# Altium PCB mainBoard.PcbDoc
Units mm, origin at the board's own origin, x right, y up, seen from the top; angles counter-clockwise.
Board outline 84 x 68 mm, 2 copper layers (Top Layer, Bottom Layer); 84 components, 78 nets, 314 pads, 0 vias.
Unrouted connection lines stored in the file: 203.
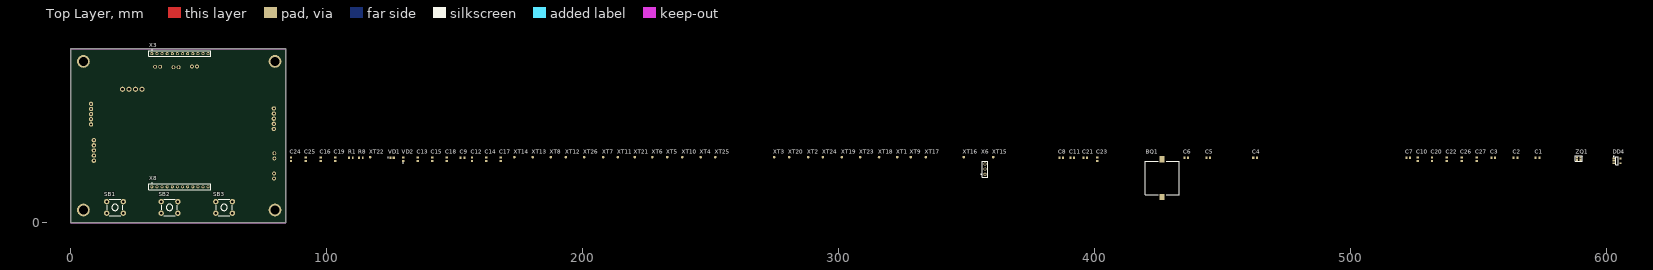
[diagram p0: Top Layer view]
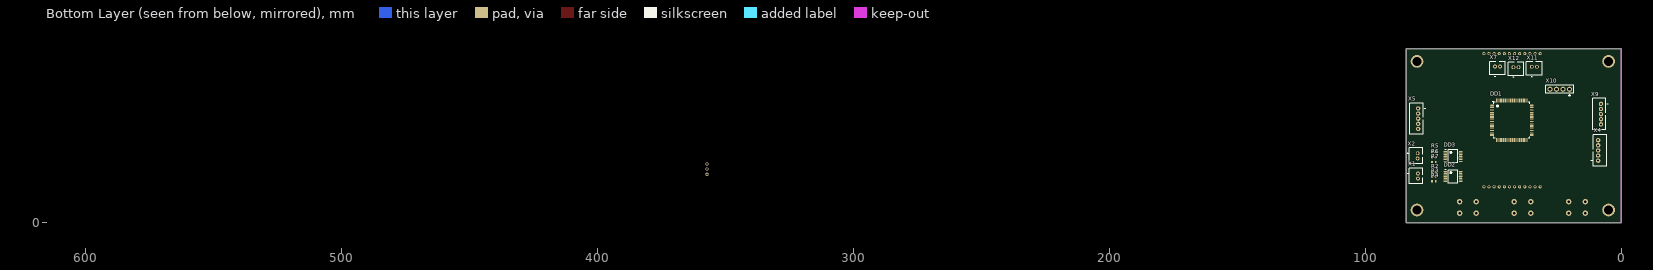
[diagram p1: Bottom Layer view, seen from below]

## Layer stack, top to bottom
Top Solder: solder mask 0.0102, Solder Resist, Dk 3.5
Top Layer: signal copper 0.0356
Dielectric 1: dielectric 0.32, FR-4, Dk 4.8
Bottom Layer: signal copper 0.0356
Bottom Solder: solder mask 0.0102, Solder Resist, Dk 3.5

## Board outline
0,0 84,0 84,68 0,68

## Design rules (kind name [scope] priority, off if disabled: settings)
Clearance [All] p1: gap=0.254 ignorepadtopadclearanceinfootprint=FALSE except(0: Arc-Hole Track-Hole SMDPad-Hole THPad-Hole Via-Hole Fill-Hole Poly-Hole Region-Hole Text-Hole)
PolygonConnect [All] p1: connectstyle=Relief reliefconductorwidth=0.254 reliefentries=4 polygonreliefangle="90 Angle" airgapwidth=0.254
RoutingVias [All] p1: holewidth=0.711 width=1.27 viastyle="Through Hole" minholewidth=0.711 minwidth=1.27 maxholewidth=0.711 maxwidth=1.27
SolderMaskExpansion [All] p1: expansion=0.102
Width [All] p1: maxlimit=0.254 minlimit=0.254 preferedwidth=0.254
30 further rules are at their usual default settings.

## Components (designator, comment, footprint, x,y, rotation, side; value= is the part's Value field where it differs from the comment)
BQ1 "HPS13C" HPS13C 426.399,17.4 r0 top
C1 "0.01u" C0603 572.999,25.4 r0 top
C2 "0.1u" C0603 564.399,25.4 r0 top
C3 "0.01u" C0603 555.699,25.4 r0 top
C4 "0.01u" C0603 462.699,25.4 r0 top
C5 "0.1u" C0603 444.399,25.4 r0 top
C6 "0.01u" C0603 435.799,25.4 r0 top
C7 "10u" C0603 522.499,25.4 r0 top
C8 "10u" C0603 386.999,25.4 r0 top
C9 "4.7u" C0603 153.1,25.4 r0 top
C10 "0.1u" C0603 526.199,24.8 r90 top
C11 "0.1u" C0603 391.299,25.4 r0 top
C12 "0.1u" C0603 156.8,24.8 r90 top
C13 "0.1u" C0603 135.7,24.8 r90 top
C14 "0.1u" C0603 162.4,24.8 r90 top
C15 "0.1u" C0603 141.3,24.8 r90 top
C16 "1u" C0603 97.8,24.8 r90 top
C17 "0.1u" C0603 168,24.8 r90 top
C18 "0.1u" C0603 146.9,24.8 r90 top
C19 "0.1u" C0603 103.4,24.8 r90 top
C20 "10u" C0603 531.799,24.8 r90 top
C21 "10u" C0603 396.399,25.4 r0 top
C22 "0.1u" C0603 537.599,24.8 r90 top
C23 "0.1u" C0603 401.099,24.8 r90 top
C24 "2.2u" C0603 86.1,24.8 r90 top
C25 "2.2u" C0603 91.9,24.8 r90 top
C26 "6p" C0603 543.399,24.8 r90 top
C27 "6p" C0603 549.299,24.8 r90 top
DD1 "STM32F407V" LQFP100 42.8,40 r180 bottom locked
DD2 "MAX31856MUD" TSSOP65P640X120-14N 65.8,18 r180 bottom
DD3 "MAX31856MUD" TSSOP65P640X120-14N 65.8,25.9 r180 bottom
DD4 "24AA08" SOT95P245X145-5N 604.099,24.1 r0 top
R1 "200" R0603 109.5,25.4 r0 top
R2 "0" R0603 73.3,19.7 r180 bottom
R3 "0" R0603 73.3,17.9 r180 bottom
R4 "0" R0603 73.3,16.1 r180 bottom
R5 "0" R0603 73.3,27.7 r180 bottom
R6 "0" R0603 73.3,25.6 r180 bottom
R7 "0" R0603 73.3,23.7 r180 bottom
R8 "200" R0603 113.4,25.4 r0 top
SB1 "*" TS_6x6 17.371,5.943 r0 top
SB2 "*" TS_6x6 38.671,5.943 r0 top
SB3 "*" TS_6x6 59.971,5.943 r0 top
VD1 "*" "LED 0603_Green" 125.6,25.4 r0 top value="0603 green"
VD2 "*" "LED 0603_RED" 129.9,24.8 r90 top value=0603red
X1 "DS1066-02M" DS1066-02M 80.2,18.2 r270 bottom
X2 "DS1066-02M" DS1066-02M 80.3,26.1 r270 bottom
X3 "PBS2-12" PBS2-12 31.738,66 r0 top
X4 "DS1066-05M" DS1066-05M 8.4,28.2 r90 bottom
X5 "DS1066-05M" DS1066-05M 80.1,40.6 r270 bottom
X6 "PLS2-3" PLS2-3 357.199,20.9 r90 top
X7 "DS1066-02M" DS1066-02M 48.4,60.3 r180 bottom
X8 "PBS2-12" PBS2-12 31.738,14 r0 top
X9 "DS1066-06M" DS1066-05M 8.7,42.4 r270 bottom
X10 "PLS-4" PLS-4 24.1,52.1 r0 bottom
X11 "DS1066-02M" DS1066-02M 34,60.2 r180 bottom
X12 "DS1066-02M" DS1066-02M 41.2,60 r180 bottom
XT1 "CheckPoint" CheckPoint_2mm 322.899,25.6 r90 top
XT2 "CheckPoint" CheckPoint_2mm 288.099,25.6 r90 top
XT3 "CheckPoint" CheckPoint_2mm 274.799,25.6 r90 top
XT4 "CheckPoint" CheckPoint_2mm 246.099,25.6 r90 top
XT5 "CheckPoint" CheckPoint_2mm 233.099,25.6 r90 top
XT6 "CheckPoint" CheckPoint_2mm 227.299,25.6 r90 top
XT7 "CheckPoint" CheckPoint_2mm 208,25.6 r90 top
XT8 "CheckPoint" CheckPoint_2mm 187.6,25.6 r90 top
XT9 "CheckPoint" CheckPoint_2mm 328.199,25.6 r90 top
XT10 "CheckPoint" CheckPoint_2mm 238.999,25.6 r90 top
XT11 "CheckPoint" CheckPoint_2mm 213.8,25.6 r90 top
XT12 "CheckPoint" CheckPoint_2mm 193.5,25.6 r90 top
XT13 "CheckPoint" CheckPoint_2mm 180.5,25.6 r90 top
XT14 "CheckPoint" CheckPoint_2mm 173.4,25.6 r90 top
XT15 "CheckPoint" CheckPoint_2mm 360.399,25.6 r90 top
XT16 "CheckPoint" CheckPoint_2mm 348.899,25.6 r90 top
XT17 "CheckPoint" CheckPoint_2mm 334.099,25.6 r90 top
XT18 "CheckPoint" CheckPoint_2mm 315.799,25.6 r90 top
XT19 "CheckPoint" CheckPoint_2mm 301.299,25.6 r90 top
XT20 "CheckPoint" CheckPoint_2mm 280.699,25.6 r90 top
XT21 "CheckPoint" CheckPoint_2mm 220.4,25.6 r90 top
XT22 "CheckPoint" CheckPoint_2mm 117,25.6 r90 top
XT23 "CheckPoint" CheckPoint_2mm 308.399,25.6 r90 top
XT24 "CheckPoint" CheckPoint_2mm 293.899,25.6 r90 top
XT25 "CheckPoint" CheckPoint_2mm 251.899,25.6 r90 top
XT26 "CheckPoint" CheckPoint_2mm 200.6,25.6 r90 top
ZQ1 "24MHz" XRCGB_F_Z 589.099,25 r0 top

## Footprints (in the part's own frame and the unit in brackets; to place one, negate y for a bottom-side part, rotate by r counter-clockwise, add the part's x,y. Pads: shape width x height; smd on the part's side, far side on the other; paste and mask are expansions set on the pad)
C0603 [mm] "Chip Capacitor, 2-Leads, Body 1,60x0,80mm, IPC Medium Density"
  rect 0.8x0.95 smd: 1(-0.725,0) 2(0.725,0)
  body extent -0.85,-0.45 0.85,0.45, height 0.9
CheckPoint_2mm [mm]
  round 1 smd: 1(0,0)
DS1066-02M [mm] "step 2mm"
  round 1.5 hole 0.8 mask+0.15: 1(-1,0.7) 2(1,0.7)
  silkscreen extent -3.1,-3.3 3.1,2.6, body extent -3,-2.2 3,2.3, height 6
DS1066-05M [mm] "step 2mm"
  round 1.7 hole 0.8: 1(-4,0.7) 2(-2,0.7) 3(0,0.7) 4(2,0.7) 5(4,0.7)
  silkscreen extent -6.1,-2.6 6.1,3.4, body extent -6,-2.1 6,2.4, height 6
HPS13C [mm]
  rect 2x2.5 smd: 1(0,7.4) 2(0,-7.4)
  silkscreen extent -6.6,-6.6 6.6,6.6, body extent -6.4,-6.4 6.4,6.4, height 2.5
"LED 0603_Green" [mm] "Chip LED, 2-Leads, Body 1,60x0,85mm, IPC Medium Density"
  rect 0.8x0.95 smd: 1(-0.65,0) 2(0.65,0)
  silkscreen extent -1.67,-0.1 -1.48,0.1, body extent -0.8,-0.4 0.8,0.4, height 0.6
"LED 0603_RED" [mm] "Chip LED, 2-Leads, Body 1,60x0,85mm, IPC Medium Density"
  rect 0.8x0.95 smd: 1(-0.65,0) 2(0.65,0)
  silkscreen extent -1.67,-0.1 -1.48,0.1, body extent -0.8,-0.4 0.8,0.4, height 0.6
LQFP100 [mm] "LQFP, 100-Leads, Body 14,00x14,00mm, Pitch 0,50mm, IPC Medium Density"
  oval 1.45x0.3 smd: 1(-7.725,6)
  rect 1.45x0.3 smd: 2(-7.725,5.5) 3(-7.725,5) 4(-7.725,4.5) 5(-7.725,4) 6(-7.725,3.5) 7(-7.725,3) 8(-7.725,2.5) 9(-7.725,2) 10(-7.725,1.5) 11(-7.725,1) 12(-7.725,0.5) 13(-7.725,0) 14(-7.725,-0.5) 15(-7.725,-1) 16(-7.725,-1.5) 17(-7.725,-2) 18(-7.725,-2.5) 19(-7.725,-3) 20(-7.725,-3.5) 21(-7.725,-4) 22(-7.725,-4.5) 23(-7.725,-5) 24(-7.725,-5.5) 25(-7.725,-6) 51(7.725,-6) 52(7.725,-5.5) 53(7.725,-5) 54(7.725,-4.5) 55(7.725,-4) 56(7.725,-3.5) 57(7.725,-3) 58(7.725,-2.5) 59(7.725,-2) 60(7.725,-1.5) 61(7.725,-1) 62(7.725,-0.5) 63(7.725,0) 64(7.725,0.5) 65(7.725,1) 66(7.725,1.5) 67(7.725,2) 68(7.725,2.5) 69(7.725,3) 70(7.725,3.5) 71(7.725,4) 72(7.725,4.5) 73(7.725,5) 74(7.725,5.5) 75(7.725,6)
  rect 0.3x1.45 smd: 26(-6,-7.725) 27(-5.5,-7.725) 28(-5,-7.725) 29(-4.5,-7.725) 30(-4,-7.725) 31(-3.5,-7.725) 32(-3,-7.725) 33(-2.5,-7.725) 34(-2,-7.725) 35(-1.5,-7.725) 36(-1,-7.725) 37(-0.5,-7.725) 38(0,-7.725) 39(0.5,-7.725) 40(1,-7.725) 41(1.5,-7.725) 42(2,-7.725) 43(2.5,-7.725) 44(3,-7.725) 45(3.5,-7.725) 46(4,-7.725) 47(4.5,-7.725) 48(5,-7.725) 49(5.5,-7.725) 50(6,-7.725) 76(6,7.725) 77(5.5,7.725) 78(5,7.725) 79(4.5,7.725) 80(4,7.725) 81(3.5,7.725) 82(3,7.725) 83(2.5,7.725) 84(2,7.725) 85(1.5,7.725) 86(1,7.725) 87(0.5,7.725) 88(0,7.725) 89(-0.5,7.725) 90(-1,7.725) 91(-1.5,7.725) 92(-2,7.725) 93(-2.5,7.725) 94(-3,7.725) 95(-3.5,7.725) 96(-4,7.725) 97(-4.5,7.725) 98(-5,7.725) 99(-5.5,7.725) 100(-6,7.725)
  silkscreen extent -7.53,-7.02 7,7.47, body extent -8,-8 8,8, height 1.6
PBS2-12 [mm]
  round 1.2 hole 0.7: 1(0,0) 2(2,0) 3(4,0) 4(6,0) 5(8,0) 6(10,0) 7(12,0) 8(14,0) 9(16,0) 10(18,0) 11(20,0) 12(22,0)
  silkscreen extent -1.1,-1.1 23.1,1.6, body extent -1,-1 23,1, height 4.5
PLS2-3 [mm]
  round 1.2 hole 0.7: 1(-2,0) 2(0,0) 3(2,0)
  silkscreen extent -3.1,-1.1 3.1,1.6, body extent -3,-1 3,1, height 6.3
PLS-4 [mm] "PLS 2.54mm pitch"
  round 2 hole 1: 1(-3.81,0) 2(-1.27,0) 3(1.27,0) 4(3.81,0)
  silkscreen extent -5.5,-1.6 5.4,2.62, body extent -5.08,-1.27 5.08,1.27, height 8.44
R0603 [mm] "Chip Resistor, 2-Leads, Body 1,60x0,85mm, IPC Medium Density"
  rect 0.7x0.95 smd: 1(-0.75,0) 2(0.75,0)
  body extent -0.8,-0.4 0.8,0.4, height 0.4
SOT95P245X145-5N [mm] "SOT23, 5-Leads, Body 2,90x2,45mm, Pitch 0,95mm, IPC Medium Density"
  rect 0.8x0.6 smd: 1(-1.3,0.95) 2(-1.3,0) 3(-1.3,-0.95) 4(1.3,-0.95) 5(1.3,0.95)
  silkscreen extent -1.42,-1.55 0.5,1.92, body extent -1.25,-1.5 1.25,1.5, height 1.05
TS_6x6 [mm] "6.5x6.5mm SMD tact switch 4.3mm stem"
  round 0.508 on Mech15: 0(0,0)
  round 2.1 hole 1: 1(-3.25,-2.25) 1(3.25,-2.25) 2(-3.25,2.25) 2(3.25,2.25)
  silkscreen extent -3.1,-3.17 3.1,3.17, body extent -3.95,-3 3.95,3, height 8
TSSOP65P640X120-14N [mm] "TSTSOP, 14-Leads, Body 5,00x4,40mm, Pitch 0,65mm, IPC Medium Density"
  oval 1.4x0.45 smd: 1(-2.95,1.95) 2(-2.95,1.3) 3(-2.95,0.65) 4(-2.95,0) 5(-2.95,-0.65) 6(-2.95,-1.3) 7(-2.95,-1.95) 8(2.95,-1.95) 9(2.95,-1.3) 10(2.95,-0.65) 11(2.95,0) 12(2.95,0.65) 13(2.95,1.3) 14(2.95,1.95)
  silkscreen extent -3.08,-2.55 1.85,2.85, body extent -3.2,-2.55 3.2,2.55, height 1.2
XRCGB_F_Z [mm] "smd 2x1.6 mm crystal resonator"
  rect 0.8x0.7 smd: 1(-0.675,-0.5) 2(0.675,-0.5) 3(0.675,0.5) 4(-0.675,0.5)
  silkscreen extent -1.3,-1.07 1.3,1.07, body extent -1,-0.8 1,0.8, height 0.65

## Part data
BQ1: library part Buzzer, Name=HPS13C
C1 C2 C3 C4 C5 C6 C7 C8 C9 C10 C11 C12 C13 C14 C15 C16 C17 C18 C19 C20 C21 C22 C23 C24 C25 C26 C27: library part Capasitor
  C26 C27: Other=Алиэкспрес
DD1: "100pins, 168MHz", Name=STM32F407V
DD4: "8K I2C Serial EEPROM", Name=24AA08
R1 R2 R3 R4 R5 R6 R7 R8: library part Resistor
SB1 SB2 SB3: library part Button
VD1 VD2: library part LED
X1 X2 X7 X11 X12: library part 2-PIN, Name=DS1066-02M
X3 X8: library part 12-PIN, Name=PBS2-12
X4 X5 X9: library part 5-PIN
  X4 X5: Name=DS1066-05M
  X9: Name=DS1066-06M
X6: library part 3-PIN, Name=PLS2-3, Pins=3
X10: library part 4-PIN, Name=PLS-4
ZQ1: library part Resonator, Name=XRCGB_F_Z
DD2 DD3: Name=MAX31856MUD

## Free pads (board coordinates)
  round 5 hole 3.5: 0(5.003,4.943) 0(5.003,63) 0(79.838,4.943) 0(79.838,63)

## Nets (pads, with @x,y where several pads share a name; then routed paths per layer and width w, separated by ;. In a path a pad name is that pad's centre, name@x,y a point inside that pad or via, vN(x,y) a via of type N, cw(c..) or ccw(c..) an arc to the next point about the centre after c; other vN are vias at no path point)
3.3V: C7.2 C8.2 C9.2 C10.2 C11.2 C12.2 C13.2 C14.2 C15.2 C16.2 C17.2 C18.2 C19.2 C20.2 C21.2 C22.2 C23.2 DD1.6 DD1.11 DD1.19 DD1.21 DD1.22 DD1.28 DD1.50 DD1.75 DD1.100 DD2.5 DD2.8 DD3.5 DD3.8 DD4.4 SB1.1 SB2.1 SB3.1 VD1.1 X3.12 X4.4 X5.4 X10.1 X11.1
Button1: DD1.35 SB1.2
Button2: DD1.36 SB2.2
Button3: DD1.37 SB3.2
dryControl: DD1.68 X9.3 XT6.1
dryFanPWM: DD1.66 X9.5 XT21.1
dryReed: DD1.2 X7.1
EEPROM_SCL: DD1.47 DD4.1 XT11.1
EEPROM_SDA: DD1.48 DD4.2 XT12.1
EncLeft_A: DD1.63 X4.1
EncLeft_B: DD1.64 X4.2
EncLeft_Button: DD1.65 X4.3
EncRight_A: DD1.23 X5.1
EncRight_B: DD1.24 X5.2
EncRight_Button: DD1.25 X5.3
GND: BQ1.2 C26.1 C27.1 DD2.1 DD2.14 DD3.1 DD3.14 DD4.3 DD4.5 R1.2 R8.2 X3.11 X4.5 X5.5 X6.3 X7.2 X10.3 X11.2 X12.2
LCD_Backlight: DD1.95 X3.10 XT10.1
LCD_CS: DD1.88 X3.7 XT25.1
LCD_D0: DD1.61 X3.1
LCD_D1: DD1.62 X3.2
LCD_D2: DD1.81 X3.3
LCD_D3: DD1.82 X3.4
LCD_D4: DD1.38 X8.12
LCD_D5: DD1.39 X8.11
LCD_D6: DD1.40 X8.10
LCD_D7: DD1.41 X8.9
LCD_D8: DD1.42 X8.8
LCD_D9: DD1.43 X8.7
LCD_D10: DD1.44 X8.6
LCD_D11: DD1.45 X8.5
LCD_D12: DD1.46 X8.4
LCD_D13: DD1.55 X8.3
LCD_D14: DD1.56 X8.2
LCD_D15: DD1.57 X8.1
LCD_D/C: DD1.58 X3.8 XT26.1
LCD_RD: DD1.85 X3.5 XT23.1
LCD_RST: DD1.89 X3.9 XT9.1
LCD_WR: DD1.86 X3.6 XT24.1
LED: DD1.3 VD2.1
MCU_OSC_IN: C26.2 DD1.12 ZQ1.1
MCU_OSC_OUT: C27.2 DD1.13 ZQ1.3
NetC1_1: C1.1 C2.2 DD2.3 R3.2
NetC2_1: C2.1 C3.2 DD2.4 R4.2
NetC4_1: C4.1 C5.2 DD3.3 R6.2
NetC5_1: C5.1 C6.2 DD3.4 R7.2
NetC24_1: C24.1 DD1.73
NetC25_2: C25.2 DD1.49
NetDD1_14: DD1.14 XT22.1
NetDD2_2: DD2.2 R2.2
NetDD3_2: DD3.2 R5.2
NetR1_1: R1.1 VD1.2
NetR2_1: R2.1 R3.1 X1.1
NetR4_1: R4.1 X1.2
NetR5_1: R5.1 R6.1 X2.1
NetR7_1: R7.1 X2.2
NetR8_1: R8.1 VD2.2
smokeCatcher: DD1.70 X9.1 XT8.1
solderControl: DD1.69 X9.2 XT7.1
solderVibro: DD1.1 X12.1
speaker: BQ1.1 DD1.29
SWDCLK: DD1.76 X10.2
SWDIO: DD1.72 X10.4
tempDry_D\R\D\Y\: DD1.15 DD3.7 XT15.1
tempDry_F\A\U\L\T\: DD1.51 DD3.13 XT13.1
tempDry_SPI_CS: DD1.16 DD3.9 XT16.1
tempDry_SPI_SCK: DD1.52 DD3.10 XT14.1
tempDry_SPI_SDI: DD1.18 DD3.12 XT18.1
tempDry_SPI_SDO: DD1.17 DD3.11 XT17.1
tempSolder_D\R\D\Y\: DD1.34 DD2.7 XT20.1
tempSolder_F\A\U\L\T\: DD1.26 DD2.13 XT1.1
tempSolder_SPI_CS: DD1.33 DD2.9 XT19.1
tempSolder_SPI_SCK: DD1.30 DD2.10 XT2.1
tempSolder_SPI_SDI: DD1.32 DD2.12 XT4.1
tempSolder_SPI_SDO: DD1.31 DD2.11 XT3.1
UART_RX: DD1.79 X6.2
UART_TX: DD1.78 X6.1
VCC: C1.2 C3.1 C4.2 C6.1 C7.1 C8.1 C9.1 C10.1 C11.1 C12.1 C13.1 C14.1 C15.1 C16.1 C17.1 C18.1 C19.1 C20.1 C21.1 C22.1 C23.1 C24.2 C25.1 DD1.10 DD1.20 DD1.27 DD1.74 DD1.94 DD1.99
zerroCross: DD1.67 X9.4 XT5.1
pads on no net: DD1.4 DD1.5 DD1.7 DD1.8 DD1.9 DD1.53 DD1.54 DD1.59 DD1.60 DD1.71 DD1.77 DD1.80 DD1.83 DD1.84 DD1.87 DD1.90 DD1.91 DD1.92 DD1.93 DD1.96 DD1.97 DD1.98 DD2.6 DD3.6 SB1.0 SB2.0 SB3.0 ZQ1.2 ZQ1.4

## Keep-outs
Keep-Out Layer:
  the board outline again, w0.013

## Silkscreen, mask and mechanical layers (free items; w line width, h text height)
Mechanical 1:
  drawing of 274 lines, arcs and shapes, not listed